# Altium PCB SensorCentral.PcbDoc (part 3 of 3)
Units mm, origin at the board's own origin, x right, y up, seen from the top; angles counter-clockwise.
Board outline 99.21 x 99.07 mm, 6 copper layers (Top Layer 1, GND1, Signal, GND2, GND3, Bottom Layer 1), stack 1.538 mm thick; 91 components, 67 nets, 452 pads, 462 vias.
Unrouted connection lines stored in the file: 278.
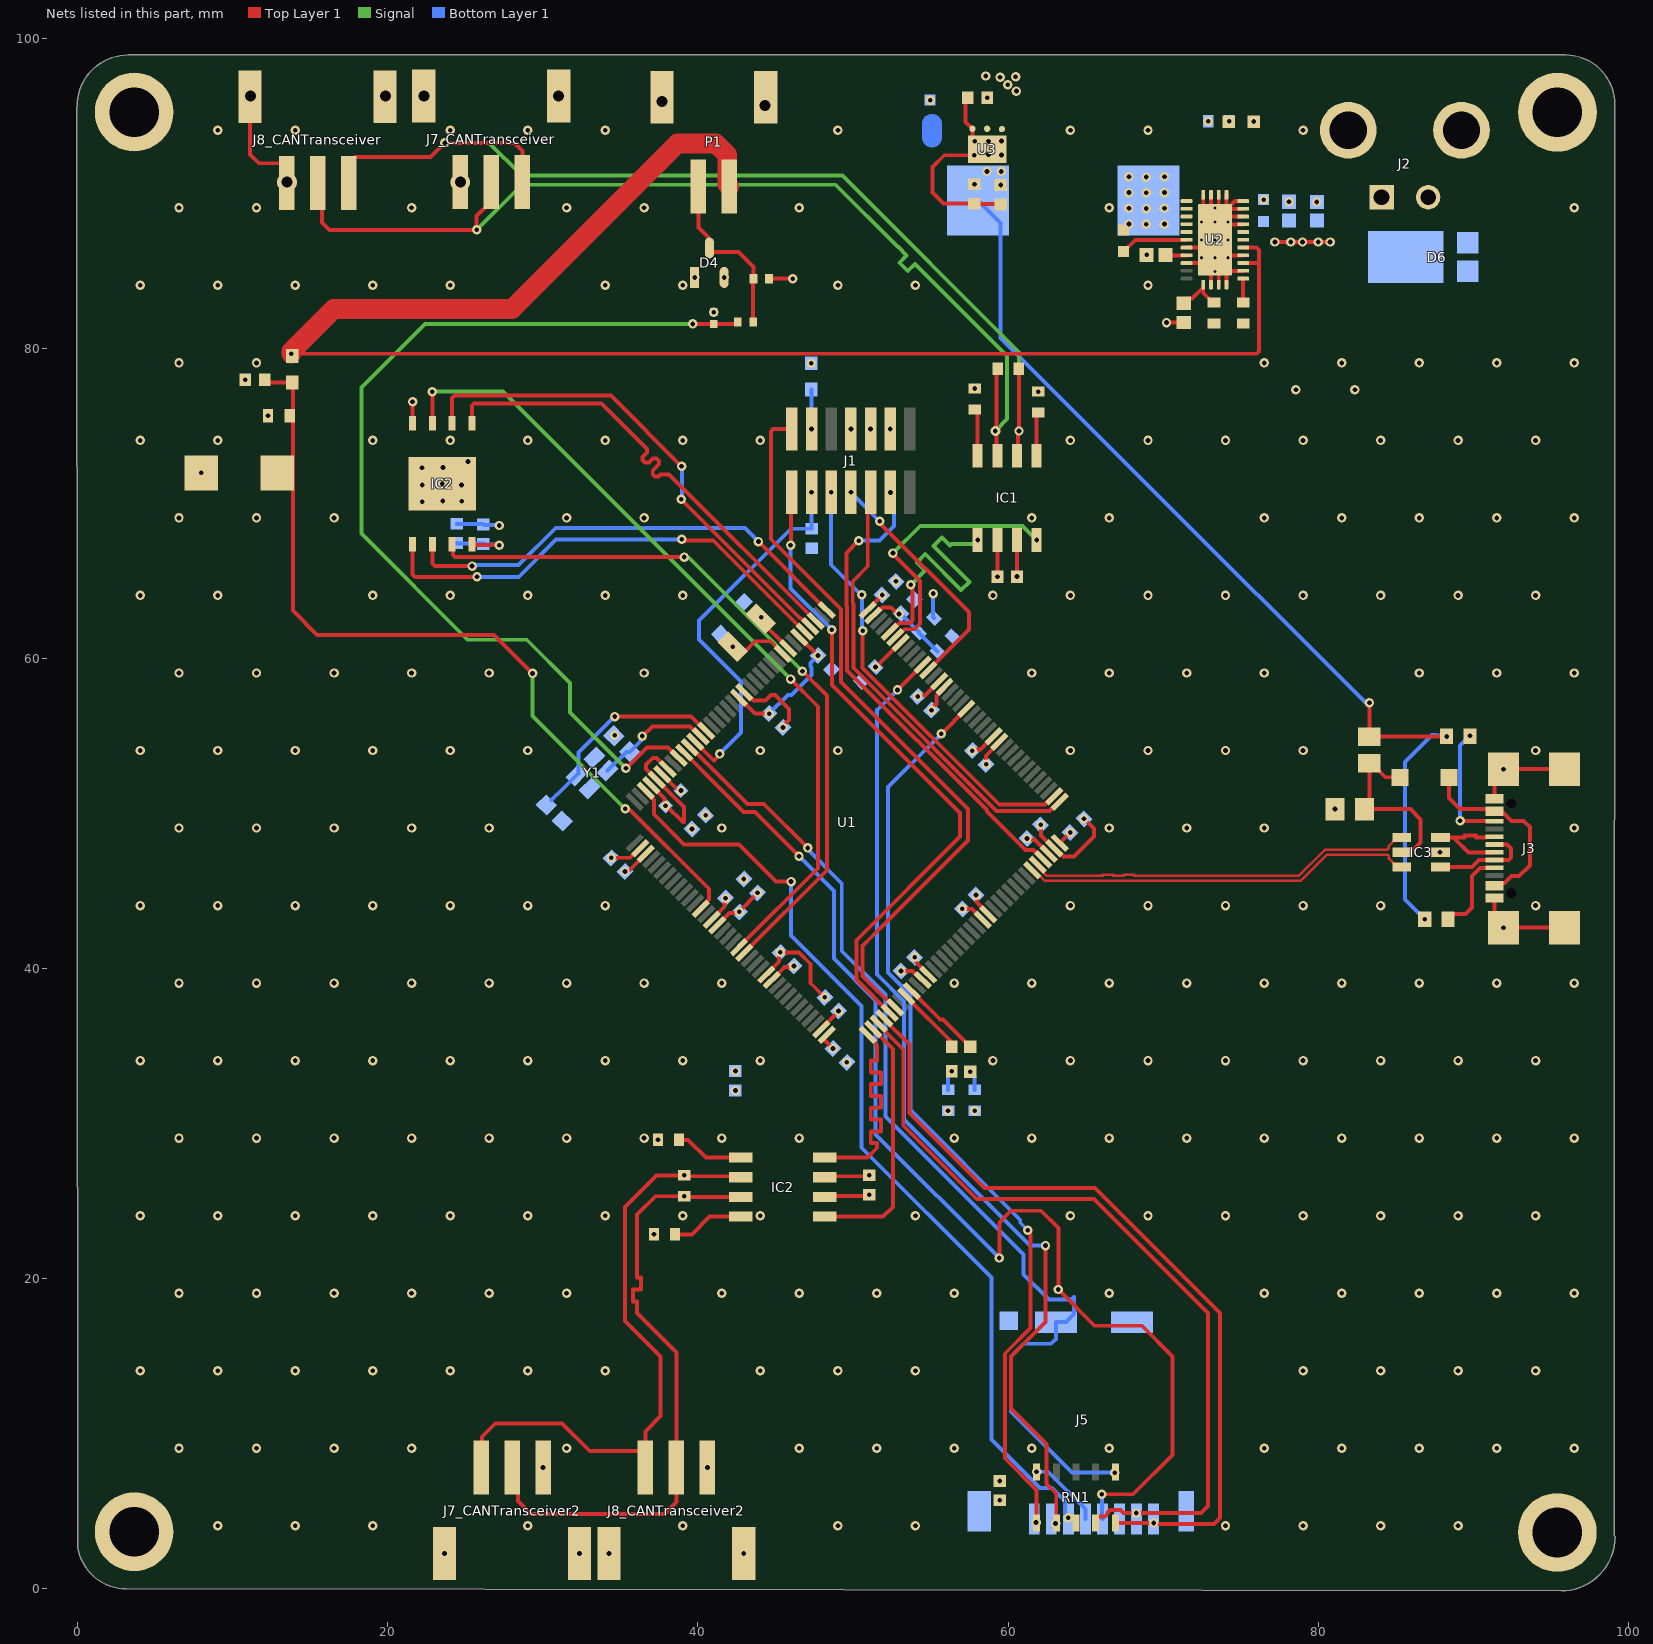
[diagram p6: the nets of this part, all layers, seen from the top]

## Via types
v1: diameter 0.61, hole 0.305, Top Layer 1 to Bottom Layer 1, tented both sides, 441 vias
v2: diameter 0.5, hole 0.2, Top Layer 1 to Bottom Layer 1, 11 vias
v3: diameter 1.27, hole 0.711, Top Layer 1 to Bottom Layer 1, tented both sides, 8 vias
v4: diameter 0.61, hole 0.33, Top Layer 1 to Bottom Layer 1, tented both sides, 1 vias
v5: diameter 0.65, hole 0.305, Top Layer 1 to Bottom Layer 1, tented both sides, 1 vias

## Nets (pads, with @x,y where several pads share a name; then routed paths per layer and width w, separated by ;. In a path a pad name is that pad's centre, name@x,y a point inside that pad or via, vN(x,y) a via of type N, cw(c..) or ccw(c..) an arc to the next point about the centre after c; other vN are vias at no path point)
5V: C8.1 D7.1 FB1.2 IC3.5 | length 11.9
  Top Layer 1 w0.254: FB1.2@83.312,53.252 83.312,50.612 C8.1@82.992,50.292 85.952,50.292 86.614,49.63 86.614,48.128 86.16,47.674 85.56,47.674 IC3.5@85.395,47.508 ; FB1.2@83.437,53.252 84.347,52.342 D7.1@85.007,52.342
ADC1_INP2: C36.1 D5.1 R12.1 R13.2 U1.49 | length 55.5
  Top Layer 1 w0.254: C36.1@12.057,77.978 12.23,77.805 13.937,77.805 13.944,77.797 13.868,77.721 13.868,72.984 D5.1@12.864,71.98 ; D5.1@13.876,73.011 13.876,63.095 15.442,61.53 26.843,61.53 v1(29.332,59.041) ; v1(35.307,50.313) 35.375,50.245 35.607,50.245 40.699,45.153 40.699,44.453 40.17,43.924 U1.49@40.17,43.862
  Signal w0.254: v1(29.332,59.041) 29.332,56.289 v1(35.307,50.313)
AN_P_PRESSURE_NOSE: C7.1 R8.2 U1.28 | length 64.1
  Top Layer 1 w0.254: v1(35.353,52.917) 36.712,54.276 38.065,54.276 U1.28@38.756,53.585 ; v1(39.672,81.582) C7.1@41.027,81.582 42.436,81.582 R8.2@42.559,81.706 R8.2@42.559,81.706
  Signal w0.254: v1(35.353,52.917) 31.75,56.52 31.75,58.42 28.956,61.214 25.146,61.214 18.288,68.072 18.288,77.47 22.4,81.582 v1(39.672,81.582)
BOOT0: R2.2 U1.138 | length 2.3
  Top Layer 1 w0.254: v1(51.455,59.456) 51.489,59.456 53.042,61.009 U1.138@53.075,61.009
CANH_CANTransceiver: IC1.7 J7_CANTransceiver.2 J8_CANTransceiver.2 R16.1 | length 68.6
  Top Layer 1 w0.254: J8_CANTransceiver.2@15.494,90.73 15.748,90.476 15.748,88.138 16.236,87.65 v1(25.728,87.65) 25.728,88.538 26.67,89.48 J7_CANTransceiver.2@26.67,90.73 ; IC1.7@59.309,73.07 59.245,73.134 59.245,74.612 v5(59.182,74.676) 59.258,74.752 59.258,78.619 R16.1@59.334,78.695
  Signal w0.254: v1(25.728,87.65) 28.639,90.561 48.885,90.561 52.826,86.62 52.916,86.53 52.925,86.539 53.463,86 52.992,85.528 53.531,84.99 53.993,85.453 54.149,85.297 59.944,79.502 59.944,75.438 v5(59.182,74.676)
CANH_CANTransceiver2: IC2.7@42.754,25.273 J7_CANTransceiver2.2 J8_CANTransceiver2.2 R16_CANTransceiver2.1 | length 41
  Top Layer 1 w0.254: J7_CANTransceiver2.2@28.008,7.822 28.381,7.449 28.381,5.655 29.21,4.826 37.846,4.826 38.608,5.588 J8_CANTransceiver2.2@38.608,7.822 38.608,15.24 36.068,17.78 36.068,18.415 36.068,18.542 35.814,18.542 35.814,19.304 36.32,19.304 36.32,20.066 36.068,20.066 36.068,20.442 36.068,24.13 37.255,25.317 v1(39.116,25.317) 39.16,25.273 IC2.7@42.754,25.273
CANL_CANTransceiver: IC1.6 J7_CANTransceiver.3 J8_CANTransceiver.3 R16.2 | length 68.6
  Top Layer 1 w0.254: J8_CANTransceiver.3@17.494,90.73 17.494,91.98 17.867,92.353 22.76,92.353 v1(23.663,93.256) 28.156,93.256 28.67,92.742 J7_CANTransceiver.3@28.67,90.73 ; IC1.6@60.579,73.07 60.642,73.134 60.642,74.612 v1(60.706,74.676) 60.697,74.685 60.697,78.686 R16.2@60.688,78.695
  Signal w0.254: v1(23.663,93.256) 26.535,93.256 28.646,91.145 49.317,91.145 60.706,79.756 v1(60.706,74.676)
CANL_CANTransceiver2: IC2.6@42.754,26.543 J7_CANTransceiver2.3 J8_CANTransceiver2.3 R16_CANTransceiver2.2 | length 41
  Top Layer 1 w0.254: J7_CANTransceiver2.3@26.008,7.822 26.06,7.874 26.06,9.804 26.924,10.668 31.242,10.668 33.02,8.89 36.235,8.89 36.608,8.517 J8_CANTransceiver2.3@36.608,7.822 36.608,10.157 37.592,11.141 37.592,14.986 35.306,17.272 35.306,24.638 37.338,26.67 v1(39.116,26.67) 39.179,26.606 42.69,26.606 IC2.6@42.754,26.543
CARD_DETECT: J5.10 RN1.6 U1.26 | length 66.4
  Top Layer 1 w0.254: U1.26@39.463,54.292 39.525,54.292 43.192,50.625 44.246,50.625 v1(47.087,47.783)
  Bottom Layer 1 w0.254: v1(47.087,47.783) 47.087,47.687 49.276,45.498 49.276,41.148 52.094,38.33 52.094,30.459 61,21.553 61,20.28 62.633,18.647 64.074,18.647 64.262,18.835 64.262,17.723 63.738,17.199 J5.10@63.088,17.199 63.088,16.118 62.774,15.804 61.011,15.804 60.198,14.991 60.198,11.43 64.139,7.489 v1(66.882,7.489)
CC1: J3.A5 R18.2 | length 5.6
  Top Layer 1 w0.254: R18.2@88.38,43.18 88.38,43.221 88.678,43.519 89.493,43.519 89.916,43.942 89.916,45.974 90.444,46.502 J3.A5@91.381,46.502
CC2: J3.B5 R19.1 | length 8.5
  Top Layer 1 w0.254: v1@89.155,49.529 90.809,49.529 90.813,49.525 91.356,49.525 J3.B5@91.38,49.501 ; R19.1@89.789,54.977 89.789,55.052 R19.1@90.087,55.35
  Bottom Layer 1 w0.254: v1(89.154,49.53) 89.154,54.379 v1(89.789,55.015)
CD/DAT3: J5.2 RN1.2 U1.134 | length 63.8
  Top Layer 1 w0.254: v1(52.869,57.975) U1.134@54.489,59.595 ; v1(62.417,22.138) 62.417,17.211 60.198,14.991 60.198,11.63 62.489,9.339 62.489,6.759 63.11,6.137 63.11,4.256 v1(63.066,4.212)
  Bottom Layer 1 w0.254: v1(52.869,57.975) 51.562,56.669 51.562,39.612 53.289,37.886 53.289,30.277 61.428,22.138 v1(62.417,22.138)
CL_PRESSURE_NOSE: D4.3 P1.2 R8.1 R17.1 | length 10.9
  Top Layer 1 w0.254: P1.2@40.027,90.194 40.027,87.812 40.677,87.162 40.677,86.544 D4.3@40.738,86.483 ; D4.3@40.738,86.365 40.885,86.218 42.612,86.218 43.575,85.254 R17.1@43.575,84.5 ; R17.1@43.55,84.5 43.55,83.289 43.559,83.28 R8.1@43.559,81.706
CLK: J5.5 U1.27 | length 75
  Top Layer 1 w0.254: U1.27@39.11,53.938 40.157,52.891 40.157,52.875 42.934,50.098 43.671,50.098 v1(46.517,47.252) ; v1(59.436,21.336) 59.436,23.622 60.198,24.384 62.127,24.384 63.246,23.265 v1(63.246,19.304) 65.583,16.967 68.631,16.967 70.612,14.986 70.612,8.636 68.072,6.096 v1(66.04,6.096)
  Bottom Layer 1 w0.254: v1(46.517,47.252) 48.768,45.001 48.768,40.64 51.46,37.948 51.46,29.312 v1(59.436,21.336) ; v1(66.04,6.096) 66.064,6.072 66.064,4.523 J5.5@66.088,4.499
CMD: J5.3 RN1.3 U1.34 | length 62
  Top Layer 1 w0.254: U1.34@36.635,51.464 36.635,51.401 37.163,50.873 37.163,49.959 39.108,48.014 42.644,48.014 45.042,45.616 v1(46.007,45.616) ; v1(63.882,4.58) 64.282,4.58 64.38,4.482 RN1.3@64.38,4.247
  Bottom Layer 1 w0.254: v1(46.007,45.616) 46.007,42.131 50.546,37.592 50.546,28.448 58.928,20.066 58.928,9.633 61.255,7.307 61.255,7.304 61.598,6.961 61.6,6.961 62.072,6.489 62.833,6.489 63.665,5.656 63.665,4.797 v1(63.882,4.58)
CS: IC2.1@25.412,75.176 U1.3 | length 31.4
  Top Layer 1 w0.254: IC2.1@25.412,75.176 25.412,76.305 25.561,76.454 33.782,76.454 36.725,73.511 36.725,73.301 36.427,73.003 36.427,72.793 36.576,72.644 36.83,72.644 37.084,72.898 37.338,72.898 37.487,72.749 37.487,72.539 37.084,72.136 37.084,71.882 37.233,71.733 37.443,71.733 37.592,71.882 38.136,71.882 47.533,62.486 U1.3@47.595,62.486
DAT0: J5.7 RN1.4 U1.75 | length 52.4
  Top Layer 1 w0.254: U1.75@51.661,36.437 51.661,36.375 53.24,34.796 53.24,29.89 57.984,25.146 65.532,25.146 72.898,17.78 72.898,5.334 72.449,4.885 v1(68.277,4.885) 67.455,4.885 67.262,5.078 66.579,5.078 66.414,4.913 66.414,4.839 66.245,4.67 65.748,4.67 65.65,4.572 RN1.4@65.65,4.247
DAT1: J5.8 RN1.5 U1.76 | length 52.3
  Top Layer 1 w0.254: U1.76@52.014,36.791 52.014,36.729 53.648,35.095 53.648,30.68 58.481,25.847 65.598,25.847 73.66,17.784 73.66,4.572 73.279,4.191 69.451,4.191 v1(69.395,4.247) RN1.5@66.92,4.247
DAT2: J5.1 RN1.1 U1.126 | length 60
  Top Layer 1 w0.254: v1(55.7,55.145) 55.7,55.147 57.318,56.764 U1.126@57.318,56.767 ; v1(61.273,23.121) 61.273,23.025 61.455,22.844 61.455,16.825 59.79,15.16 59.79,8.425 61.84,6.375 61.84,4.308 v1(61.807,4.275)
  Bottom Layer 1 w0.254: v1(55.7,55.145) 53.726,53.171 53.71,53.171 52.259,51.72 52.259,39.744 53.697,38.307 53.697,30.873 60.786,23.783 60.786,23.608 v1(61.273,23.121)
DCREG5V0: C18.1 C37.1 C38.1 FB1.1 L2.2 R9.2 R10.1 R18.1 R19.2 U3.5 U3.6 | length 65.7
  Top Layer 1 w0.254: v1(59.522,90.546) C37.1@59.549,90.546 ; R9.2@73.005,81.417 73.207,81.619 R9.2@73.284,81.619 ; v1(83.312,57.15) 83.312,55.002 83.337,54.977 v1(88.289,54.977)
  Bottom Layer 1 w0.254: C18.1@54.974,94.618 C18.1@55.099,94.493 ; L2.2@58.069,89.549 59.522,88.095 59.522,80.686 69.202,71.005 82.99,57.218 83.244,57.218 v1(83.312,57.15) ; v1(86.88,43.18) 85.598,44.462 85.598,53.34 87.338,55.08 87.592,55.08 87.626,55.045 88.221,55.045 v1(88.289,54.977)
  Bottom Layer 1 w1.27: 55.099,93.613 C18.1@55.099,94.493
  other v1: 57.833,90.593 58.642,91.417 59.563,91.417
DN: IC3.1 J3.A7 J3.B7 | length 6.6
  Top Layer 1 w0.254: IC3.1@87.864,46.548 89.913,46.548 90.367,47.002 92.291,47.002 92.44,47.151 92.44,47.755 92.193,48.002 J3.A7@91.381,48.002
DP: IC3.3 J3.A6 J3.B6 | length 6.5
  Top Layer 1 w0.254: IC3.3@88.15,48.471 88.717,48.471 ; J3.A6@91.381,47.502 89.686,47.502 88.717,48.471 ; J3.B6@91.381,48.502 91.358,48.479 90.813,48.479 90.805,48.471 90.658,48.471 90.19,48.471 90.19,48.58 89.428,48.58 89.428,48.471 89.301,48.471 88.717,48.471
FB: R9.1 R11.1 U2.12 | length 3.3
  Top Layer 1 w0.254: R11.1@71.334,82.922 71.634,83.222 71.874,83.222 72.59,83.938 U2.12@72.59,84.109 72.592,84.107 72.592,83.588 73.207,82.973 R9.1@73.284,82.973
FDCAN1_RX: IC1.4 U1.139 | length 17.6
  Top Layer 1 w0.254: v1(52.578,66.802) 52.578,66.75 54.315,65.013 54.315,62.246 53.961,61.892 53.312,61.892 52.784,61.363 U1.139@52.721,61.363
  Signal w0.254: v1(52.578,66.802) 54.338,68.562 60.933,68.562 v1(61.849,67.646)
FDCAN1_TX: IC1.1 U1.140 | length 17.6
  Top Layer 1 w0.254: U1.140@52.368,61.717 52.43,61.717 53.003,62.289 53.133,62.289 53.143,62.3 53.664,62.3 53.83,62.466 53.83,64.427 53.798,64.46 53.798,64.686 v1(53.729,64.754)
  Signal w0.254: v1(53.729,64.754) 54.554,65.579 54.644,65.668 54.121,66.191 54.66,66.73 56.978,64.411 57.517,64.95 55.198,67.269 55.737,67.808 56.26,67.285 56.367,67.392 57.712,67.392 57.966,67.646 v1(58.039,67.646)
FDCAN2_RX: IC2.4@48.178,27.813 U1.73 | length 15.9
  Top Layer 1 w0.254: IC2.4@48.178,27.813 50.927,27.813 51.562,28.448 51.562,28.612 51.562,28.739 51.146,28.739 51.146,29.501 51.793,29.501 51.793,30.263 51.146,30.263 51.146,31.025 51.793,31.025 51.793,31.787 51.146,31.787 51.146,32.549 51.793,32.549 51.793,33.311 51.146,33.311 51.146,34.073 51.562,34.073 51.562,34.249 51.562,35.054 50.954,35.663 U1.73@50.954,35.73
FDCAN2_TX: IC2.1@48.178,24.003 U1.74 | length 15.9
  Top Layer 1 w0.254: 48.941,24.003 51.943,24.003 52.578,24.638 52.578,34.813 U1.74@51.307,36.084
FLASH_RESET: IC2.7@24.142,67.376 U1.57 | length 47.4
  Top Layer 1 w0.254: IC2.7@24.142,67.376 24.194,67.324 24.194,66.697 24.342,66.548 v1(39.116,66.548) ; U1.57@42.999,41.034 48.309,46.344 48.309,57.609 v1(46.736,59.182)
  Signal w0.254: v1(39.116,66.548) 39.184,66.48 39.438,66.48 v1(46.736,59.182)
FLASH_WP: IC2.3@22.872,75.176 U1.56 | length 53
  Top Layer 1 w0.254: v1(22.86,77.216) 22.866,77.21 22.866,75.182 IC2.3@22.872,75.176 ; U1.56@42.645,41.387 47.757,46.499 47.757,56.891 v1(45.974,58.674)
  Signal w0.254: v1(22.86,77.216) 27.432,77.216 v1(45.974,58.674)
GND: C1.2 C2.2 C3.2 C4.2 C5.2 C6.2 C7.2 C8.2 C11.2 C13.2 C14.2 C15.2 C16.2 C18.2 C19.2 C20.2 C21.2 C22.2 C23.2 C24.2 C25.1 C26.2 C27.2 C28.2 C29.2 C30.2 C31.2 C32.2 C33.2 C34.2 C35.2 C36.2 C37.2 C38.2 C39.2 C46.2 C46_CANTransceiver2.2 C47.2 C48.2 C71.2 D5.2 IC1.2 IC2.2@48.178,25.273 IC2.4@21.602,75.176 IC2.9 IC3.2 J1.5 J1.7 J2.2 J2.3 J2.4 J3.A1_B12 J3.B1_A12 J3.SH1 J3.SH2 J3.SH3 J3.SH4 J5.6 J5.9 J5.11 J5.12 J5.13 J7_CANTransceiver2.1 J7_CANTransceiver2.4 J7_CANTransceiver2.5 J7_CANTransceiver.1 J7_CANTransceiver.4 J7_CANTransceiver.5 J8_CANTransceiver2.1 J8_CANTransceiver2.4 J8_CANTransceiver2.5 J8_CANTransceiver.1 J8_CANTransceiver.4 J8_CANTransceiver.5 P1.MP1 P1.MP2 pad.2 R2.1 R3.1 R4.1 R5.1 R6.1 R7.1 R11.2 R13.1 R14.2 R14_CANTransceiver2.2 R15.1 R15_CANTransceiver2.1 R17.2 U1.16 U1.31 U1.38 U1.51 U1.61 U1.83 U1.94 U1.107 U1.120 U1.130 U2.7 U2.9 U2.13 U2.14 U2.15 U2.17 U2.19 U2.23 U2.24 U2.25 U2.26 U2.27 U2.28 U2.29 U2.30 U2.31 U3.3 U3.7 Y1.2 Y1.4 | length 93
  Top Layer 1 w0.254: J8_CANTransceiver.4@11.112,96.228 11.112,92.52 11.684,91.948 13.089,91.948 13.462,91.575 J8_CANTransceiver.1@13.462,90.678 ; v1(21.595,76.557) 21.595,75.182 IC2.4@21.602,75.176 ; J7_CANTransceiver.1@24.638,90.698 v3(24.67,90.73) ; v1(34.407,47.15) 35.618,47.15 36.219,47.751 U1.38@36.281,47.751 ; U1.31@37.695,52.524 38.665,51.555 38.832,51.555 v1(38.9,51.487) ; U1.51@40.877,43.155 41.712,43.99 41.712,44.48 v1(41.78,44.548) ; U1.16@42.999,57.827 43.061,57.827 43.589,57.299 44.345,57.299 44.704,57.658 44.958,57.658 45.869,56.747 45.869,56.043 45.482,55.656 v1(45.482,55.56) ; U1.61@44.413,39.619 45.237,40.444 45.237,40.982 v1(45.305,41.05) 46.507,41.05 47.273,40.284 47.273,39.055 v1(48.179,38.149) ; R17.2@44.575,84.5 v1(46.107,84.5) ; IC2.2@48.178,25.273 48.25,25.345 50.982,25.345 v1(51.054,25.416) ; v1(53.095,39.841) 53.851,39.841 54.427,39.266 U1.83@54.489,39.266 ; v1(55.066,56.668) 55.066,56.764 55.375,57.073 55.375,57.59 55.903,58.119 U1.130@55.903,58.181 ; v1(57.052,43.858) 57.675,43.858 U1.94@58.378,43.155 ; C39.2@57.397,96.176 57.266,96.044 57.266,94.611 U3.3@57.705,94.172 57.705,93.517 v1(57.857,93.364) ; v1(57.819,92.461) 55.885,92.461 55.118,91.694 55.118,90.065 55.844,89.339 C38.2@57.833,89.339 57.856,89.315 59.499,89.315 C37.2@59.522,89.292 ; v1(58.587,53.174) 58.587,53.731 59.439,54.583 U1.120@59.439,54.645 ; IC1.2@59.309,67.646 59.313,67.642 v1(59.313,65.282) C46.2@59.317,65.278 ; v1(62.103,49.279) 62.133,49.249 62.133,48.593 U1.107@62.974,47.751 63.037,47.751 63.565,47.223 64.241,47.223 65.532,48.514 65.532,49.029 v1(64.895,49.666) ; v1(70.222,81.67) R11.2@71.334,81.67 ; U2.9@71.515,85.509 72.367,85.509 U2.31@72.598,85.74 ; U2.7@71.515,86.509 72.84,86.509 v2(73.34,87.009) ; U2.31@72.59,88.169 U2.30@72.59,89.909 ; U2.13@73.09,84.109 73.09,84.836 73.213,84.959 v2(73.34,84.959) ; U2.29@73.09,89.909 73.09,89.182 U2.31@73.213,89.059 ; U2.31@73.467,89.059 73.59,89.182 U2.28@73.59,89.909 ; U2.14@73.59,84.109 U2.31@73.59,85.732 ; U2.31@74.031,88.227 74.313,88.509 U2.24@75.165,88.509 ; U2.15@74.09,84.109 74.09,85.232 74.313,85.009 U2.17@75.165,85.009 ; U2.27@74.09,89.909 74.09,89.039 74.17,89.039 74.638,89.507 75.163,89.507 U2.26@75.165,89.509 ; U2.31@74.12,89.009 U2.25@75.165,89.009 ; U2.31@74.19,85.886 74.313,86.009 U2.19@75.165,86.009 ; v2(74.19,88.169) 74.19,88.132 74.313,88.009 U2.23@75.165,88.009 ; J3.A1_B12@91.381,44.552 91.381,43.217 v1(91.956,42.642) J3.SH3@95.886,42.642 ; J3.B1_A12@91.381,50.952 91.386,50.957 91.386,52.292 v1(91.956,52.862) J3.SH4@95.886,52.862 ; pad.2@95.435,95.238 pad.2@95.457,95.216
  Bottom Layer 1 w0.254: C48.2@24.444,68.699 24.47,68.674 26.126,68.674 26.186,68.614 27.144,68.614 v1(27.178,68.58)
  other v1: 23.658,2.272 32.358,2.272 34.258,2.272 42.958,2.272 9.026,4.069 14.026,4.069 19.026,4.069 29.026,4.069 39.026,4.069 49.026,4.069 54.026,4.069 74.026,4.069 79.026,4.069 84.026,4.069 89.026,4.069 59.473,6.958 30.008,7.822 40.608,7.822 6.526,9.069 11.526,9.069 16.526,9.069 21.526,9.069 31.526,9.069 46.526,9.069 51.526,9.069 56.526,9.069 61.526,9.069 66.526,9.069 76.526,9.069 81.526,9.069 86.526,9.069 91.526,9.069 96.526,9.069 4.026,14.069 9.026,14.069 14.026,14.069 19.026,14.069 24.026,14.069 29.026,14.069 34.026,14.069 44.026,14.069 49.026,14.069 54.026,14.069 79.026,14.069 84.026,14.069 89.026,14.069 94.026,14.069 6.526,19.069 11.526,19.069 16.526,19.069 21.526,19.069 26.526,19.069 31.526,19.069 41.526,19.069 46.526,19.069 51.526,19.069 56.526,19.069 66.526,19.069 76.526,19.069 81.526,19.069 86.526,19.069 91.526,19.069 96.526,19.069 37.169,22.86 4.026,24.069 9.026,24.069 14.026,24.069 19.026,24.069 24.026,24.069 29.026,24.069 34.026,24.069 39.026,24.069 44.026,24.069 54.026,24.069 64.026,24.069 69.026,24.069 74.026,24.069 79.026,24.069 84.026,24.069 89.026,24.069 94.026,24.069 37.423,28.956 6.526,29.069 11.526,29.069 16.526,29.069 21.526,29.069 26.526,29.069 31.526,29.069 36.526,29.069 41.526,29.069 46.526,29.069 56.526,29.069 61.526,29.069 66.526,29.069 71.526,29.069 76.526,29.069 81.526,29.069 86.526,29.069 91.526,29.069 96.526,29.069 56.134,30.831 57.847,30.831 42.418,33.393 49.6,33.961 4.026,34.069 9.026,34.069 14.026,34.069 19.026,34.069 24.026,34.069 29.026,34.069 34.026,34.069 39.026,34.069 44.026,34.069 59.026,34.069 64.026,34.069 69.026,34.069 74.026,34.069 79.026,34.069 84.026,34.069 89.026,34.069 94.026,34.069 6.526,39.069 11.526,39.069 16.526,39.069 21.526,39.069 26.526,39.069 31.526,39.069 36.526,39.069 41.526,39.069 56.526,39.069 61.526,39.069 66.526,39.069 71.526,39.069 76.526,39.069 81.526,39.069 86.526,39.069 91.526,39.069 96.526,39.069 4.026,44.069 9.026,44.069 14.026,44.069 19.026,44.069 24.026,44.069 29.026,44.069 34.026,44.069 64.026,44.069 69.026,44.069 74.026,44.069 79.026,44.069 84.026,44.069 94.026,44.069 42.961,45.779 87.864,47.498 6.526,49.069 11.526,49.069 16.526,49.069 21.526,49.069 26.526,49.069 41.526,49.069 66.526,49.069 71.526,49.069 76.526,49.069 96.526,49.069 40.497,49.895 81.092,50.292 4.026,54.069 9.026,54.069 14.026,54.069 19.026,54.069 24.026,54.069 29.026,54.069 44.026,54.069 49.026,54.069 64.026,54.069 69.026,54.069 74.026,54.069 79.026,54.069 94.026,54.069 34.632,55.045 6.526,59.069 11.526,59.069 16.526,59.069 21.526,59.069 26.526,59.069 36.526,59.069 61.526,59.069 66.526,59.069 71.526,59.069 76.526,59.069 86.526,59.069 91.526,59.069 96.526,59.069 4.026,64.069 9.026,64.069 19.026,64.069 24.026,64.069 29.026,64.069 34.026,64.069 39.026,64.069 59.026,64.069 64.026,64.069 69.026,64.069 74.026,64.069 79.026,64.069 84.026,64.069 89.026,64.069 94.026,64.069 52.766,64.984 6.526,69.069 11.526,69.069 16.526,69.069 31.526,69.069 36.526,69.069 61.526,69.069 66.526,69.069 76.526,69.069 81.526,69.069 86.526,69.069 91.526,69.069 96.526,69.069 22.221,70.114 24.772,70.147 23.535,70.164 22.212,71.198 24.747,71.198 23.507,71.276 7.964,71.98 22.204,72.3 23.551,72.317 25.171,72.707 4.026,74.069 9.026,74.069 19.026,74.069 24.026,74.069 29.026,74.069 34.026,74.069 39.026,74.069 44.026,74.069 64.026,74.069 69.026,74.069 74.026,74.069 79.026,74.069 84.026,74.069 89.026,74.069 94.026,74.069 49.864,74.802 51.134,74.802 12.269,75.659 61.954,77.216 78.566,77.339 82.376,77.339 57.855,77.414 10.803,77.978 47.315,79.047 6.526,79.069 11.526,79.069 76.526,79.069 81.526,79.069 86.526,79.069 91.526,79.069 96.526,79.069 41.027,82.339 4.026,84.069 9.026,84.069 14.026,84.069 19.026,84.069 24.026,84.069 34.026,84.069 39.026,84.069 49.026,84.069 54.026,84.069 69.026,84.069 68.943,86.038 6.526,89.069 11.526,89.069 21.526,89.069 31.526,89.069 36.526,89.069 46.526,89.069 66.526,89.069 96.526,89.069 78.122,89.463 79.92,89.453 76.488,89.599 59.58,92.481 58.741,92.506 58.741,93.364 59.574,93.377 9.026,94.069 14.026,94.069 24.026,94.069 29.026,94.069 34.026,94.069 49.026,94.069 64.026,94.069 69.026,94.069 79.026,94.069 72.911,94.664 54.974,96.018
  other v2: 72.49,85.849 73.34,85.849 74.19,85.849 72.49,87.009 74.19,87.009 72.49,88.169 73.34,88.169 73.34,89.059
  other v3: 13.494,90.73 44.329,95.676 37.677,95.944 11.144,96.28 19.844,96.28 22.32,96.28 31.02,96.28
MISO: IC2.2@24.142,75.176 U1.4 | length 32.3
  Top Layer 1 w0.254: IC2.2@24.142,75.176 24.142,76.813 24.291,76.962 34.383,76.962 v1(38.945,72.4) ; v1(38.914,70.276) 46.591,62.599 46.651,62.599 47.179,62.07 U1.4@47.241,62.07
  Bottom Layer 1 w0.254: v1(38.914,70.276) 38.976,70.338 38.976,72.369 v1(38.945,72.4)
MOSI: IC2.5@21.602,67.376 U1.5 | length 30.8
  Top Layer 1 w0.254: IC2.5@21.602,67.376 21.602,65.419 21.753,65.268 v1(25.748,65.268) ; v1(38.962,67.688) 39.03,67.62 39.281,67.62 39.282,67.619 40.985,67.619 U1.5@46.888,61.717
  Bottom Layer 1 w0.254: v1(25.748,65.268) 25.751,65.271 28.441,65.271 30.844,67.674 38.948,67.674 v1(38.962,67.688)
NetC11_1: C11.1 U2.8 | length 1.4
  Top Layer 1 w0.254: C11.1@70.144,86.038 70.174,86.009 U2.8@71.515,86.009
NetC12_1: C12.1 U2.6 | length 5.1
  Top Layer 1 w0.254: C12.1@67.442,86.246 68.204,87.009 U2.6@71.515,87.009 70.813,87.009
NetC12_2: C12.2 L2.1 U2.1 U2.2 U2.3 U2.4 U2.5
  other v1: 68.914,88.007 67.799,88.025 70.085,88.025 68.914,89.023 67.799,89.041 70.085,89.041 68.914,90.039 67.799,90.057 70.085,90.057 68.914,91.055 67.799,91.073 70.085,91.073
NetC21_1: C21.1 U1.71 | length 1.6
  Top Layer 1 w0.254: U1.71@47.948,36.084 47.948,36.114 49.066,37.232 v1(49.066,37.262)
NetC22_1: C22.1 U1.106 | length 1.8
  Top Layer 1 w0.254: v1(61.216,48.392) 61.284,48.324 61.694,48.324 U1.106@62.621,47.398
NetD1_1: D1.1 R5.2
  other v1: 74.265,94.664
NetD2_1: D2.1 R6.2 | length 1.3
  Bottom Layer 1 w0.254: R6.2@56.134,32.184 56.134,33.045 56.367,33.277 v1(56.367,33.373)
NetD3_1: D3.1 R4.2 | length 1.3
  Bottom Layer 1 w0.254: v1(57.566,33.353) 57.566,33.256 57.847,32.976 R4.2@57.847,32.184
NetD7_2: D7.2 J3.A4_B9 J3.B4_A9 | length 12.6
  Top Layer 1 w0.254: D7.2@88.443,52.324 88.443,51.003 89.154,50.292 91.713,50.292 92.475,49.53 93.256,49.53 93.655,49.131 93.655,46.665 92.964,45.974 92.475,45.974 92.026,45.525 91.554,45.525 J3.A4_B9@91.381,45.352
NetIC1_5: IC1.5 R15.2 | length 2.8
  Top Layer 1 w0.254: IC1.5@61.849,73.07 61.849,75.758 R15.2@61.954,75.863
NetIC1_8: IC1.8 R14.1 | length 3.1
  Top Layer 1 w0.254: R14.1@57.855,76.06 58.039,75.876 IC1.8@58.039,73.07
NetIC1_CANTransceiver2_5: IC2.5@42.754,27.813 R15_CANTransceiver2.2 | length 4.5
  Top Layer 1 w0.254: R15_CANTransceiver2.2@38.777,28.956 39.37,28.956 40.513,27.813 IC2.5@42.754,27.813
NetIC1_CANTransceiver2_8: IC2.8@42.754,24.003 R14_CANTransceiver2.1 | length 4.5
  Top Layer 1 w0.254: R14_CANTransceiver2.1@38.777,22.86 39.614,22.86 40.757,24.003 IC2.8@42.754,24.003
NetJ1_11: J1.11 R7.2 | length 2.5
  Bottom Layer 1 w0.254: R7.2@47.315,77.347 47.324,77.337 v1(47.324,74.802)
NetR10_2: R10.2 U2.16 | length 1.5
  Top Layer 1 w0.254: U2.16@75.165,84.509 75.165,82.992 R10.2@75.184,82.973
OTG_FS_N: IC3.6 U1.103 | length 25.2
  Top Layer 1 w0.161: U1.103@61.56,46.337 61.688,46.337 62.177,45.848 62.18,45.848 62.366,45.662 78.873,45.662 80.562,47.351 84.466,47.351 84.56,47.257 84.56,47.093 85.095,46.558 IC3.6@85.395,46.558
OTG_FS_P: IC3.4 U1.104 | length 25.2
  Top Layer 1 w0.161: U1.104@61.914,46.691 61.914,46.562 62.402,46.074 62.402,46.071 62.497,45.977 65.523,45.977 66.122,45.977 66.122,46.044 66.79,46.044 66.79,45.977 67.459,45.977 67.459,46.044 68.128,46.044 68.128,45.977 68.877,45.977 78.743,45.977 80.432,47.666 84.466,47.666 84.56,47.76 84.56,47.924 85.095,48.458 IC3.4@85.395,48.458
PD11: D2.2 U1.80 | length 4.4
  Top Layer 1 w0.254: U1.80@53.428,38.205 56.434,35.2 D2.2@56.623,35.2
PD12: D3.2 U1.81 | length 5.3
  Top Layer 1 w0.254: U1.81@53.782,38.559 55.625,36.715 55.804,36.715 D3.2@57.566,34.953
PDR_ON: C2.1 R1.2 R3.2 U1.143 | length 5.6
  Top Layer 1 w0.254: U1.143@51.307,62.777 51.369,62.777 51.898,63.306 52.443,63.306 52.874,62.875 v1(52.97,62.875)
  Bottom Layer 1 w0.254: v1(52.97,62.875) 53.048,62.875 C2.1@53.083,62.91 53.083,62.879 54.264,61.698 54.264,61.654 55.449,60.468 R3.2@55.449,60.455
SCK: IC2.6@22.872,67.376 U1.1 | length 30
  Top Layer 1 w0.254: IC2.6@22.872,67.376 22.872,66.113 23.022,65.962 v1(25.431,65.962) ; v1(43.898,67.547) 43.898,67.541 48.302,63.137 U1.1@48.302,63.131
  Bottom Layer 1 w0.254: v1(25.431,65.962) 25.497,66.029 28.437,66.029 30.828,68.42 43.026,68.42 v1(43.898,67.547)
T_JTDI: J1.10 U1.110 | length 28.5
  Top Layer 1 w0.254: v1(50.621,61.801) 50.621,59.395 59.435,50.581 62.384,50.581 62.912,51.11 U1.110@62.974,51.11
  Bottom Layer 1 w0.254: v1(48.594,70.732) 48.58,70.718 48.58,66.049 v1@50.514,64.115 ; v1(50.568,64.115) v1@50.514,64.115 ; v1(50.621,61.801) 50.594,61.828 50.594,64.034 v1@50.514,64.115
T_NRST: C1.1 J1.12 U1.25 | length 24.7
  Top Layer 1 w0.254: U1.25@39.817,54.645 39.817,54.633 41.042,53.408 41.402,53.768 v1(41.402,53.848)
  Bottom Layer 1 w0.254: v1(41.402,53.848) 42.788,55.234 42.788,58.507 40.06,61.235 40.06,62.446 45.988,68.374 47.318,68.374 47.324,68.38 v1(47.324,70.732)
T_SWCLK: J1.6 U1.109 | length 29.2
  Top Layer 1 w0.254: J1.6@51.134,70.732 50.953,70.551 50.953,65.954 49.982,64.983 49.982,63.57 50.035,63.518 50.035,59.404 59.266,50.173 62.683,50.173 63.266,50.756 U1.109@63.328,50.756
T_SWDIO: J1.4 U1.105 | length 31.5
  Top Layer 1 w0.254: v1(50.364,67.604) 49.574,66.814 49.574,63.401 49.627,63.349 49.627,59.235 58.632,50.23 58.632,50.148 61.115,47.664 61.644,47.664 62.265,47.044 U1.105@62.267,47.044 ; J1.4@52.343,70.793 J1.4@52.404,70.732
  Bottom Layer 1 w0.254: v1(50.364,67.604) 51.699,67.604 52.634,68.539 52.634,70.407 52.421,70.62 v1(52.421,70.716)
T_SWO: J1.8 U1.133 | length 15.7
  Top Layer 1 w0.254: v1(51.719,68.855) 51.787,68.787 51.787,68.685 57.482,62.989 57.482,61.881 U1.133@54.843,59.242
  Bottom Layer 1 w0.254: v1(49.864,70.732) 49.864,70.709 v1(51.719,68.855)
T_VCP_RX: J1.13 U1.78 | length 47.5
  Top Layer 1 w0.254: J1.13@46.054,74.802 44.853,74.802 44.704,74.653 44.704,67.695 49.219,63.18 49.219,58.477 57.404,50.292 57.404,48.26 52.193,43.049 51.308,42.164 51.308,42.152 50.621,41.465 50.621,39.536 52.659,37.498 U1.78@52.721,37.498
T_VCP_TX: J1.14 U1.77 | length 41.8
  Top Layer 1 w0.254: v1(45.974,67.31) 46.014,67.35 46.014,70.692 J1.14@46.054,70.732 ; v1(48.633,61.858) 48.635,61.857 48.635,58.299 56.896,50.038 56.896,48.514 50.213,41.831 50.213,39.299 U1.77@52.368,37.145
  Bottom Layer 1 w0.254: v1(45.974,67.31) 45.974,64.523 48.633,61.864 v1(48.633,61.858)
VBAT: C13.1 C14.1 C15.1 D6.3 P1.1 R12.2 U2.18 U2.20 U2.21 U2.22 | length 110.5
  Top Layer 1 w0.254: v1(13.767,79.66) 76.027,79.66 76.176,79.809 76.176,86.36 76.027,86.509 U2.20@75.165,86.509 ; U2.18@75.413,85.511 75.461,85.511 75.465,85.515 76.05,85.515 ; v1(77.216,86.868) v1(78.232,86.868) v1(78.994,86.868) v1(80.01,86.868) v1(80.772,86.868)
  Top Layer 1 w1.27: v1(13.767,79.66) 13.767,79.807 16.51,82.55 28.009,82.55 38.677,93.218 41.148,93.218 41.892,92.474 41.892,90.583 P1.1@42.027,90.448
VBAT_IN: D6.1 D6.2 J2.1
VDD: C16.1 C19.1 C20.1 C23.1 C24.1 C25.2 C26.1 C27.1 C28.1 C29.1 C30.1 C31.1 C32.1 C33.1 C34.1 C35.1 C39.1 C46.1 C46_CANTransceiver2.1 C47.1 C48.1 C71.1 D1.2 D4.1 D4.2 IC1.3 IC2.3@48.178,26.543 IC2.8@25.412,67.376 J1.3 J5.4 R1.1 RN1.10 U1.6 U1.17 U1.30 U1.32 U1.33 U1.39 U1.52 U1.62 U1.72 U1.84 U1.95 U1.108 U1.121 U1.131 U1.144 U3.1 U3.2 | length 52.8
  Top Layer 1 w0.254: IC2.8@25.412,67.376 25.477,67.31 v1(27.178,67.31) ; v1(35.294,46.263) 35.362,46.331 35.568,46.331 U1.39@36.635,47.398 ; U1.33@36.988,51.817 37.842,50.963 37.842,50.565 v1(37.91,50.497) 37.983,50.497 39.023,49.457 39.095,49.457 39.095,50.418 36.644,52.869 36.644,53.154 37.084,53.594 37.333,53.594 U1.30@38.049,52.878 ; D4.1@39.707,84.5 v1(39.788,84.582) ; U1.52@41.231,42.801 42.023,43.593 42.599,43.593 v1(42.667,43.661) 42.667,43.687 43.847,44.867 v1(43.847,44.893) ; U1.17@42.645,57.474 43.673,56.446 v1(44.595,56.446) ; U1.62@44.766,39.266 45.596,40.095 46.124,40.095 v1(46.192,40.163) ; U1.6@46.534,61.363 46.563,61.363 v1(47.736,60.191) ; IC2.3@48.178,26.543 48.242,26.606 50.99,26.606 v1(51.054,26.67) ; U1.72@48.302,35.73 48.1,35.529 48.1,35.461 v1(48.714,34.847) ; U1.144@50.954,63.131 50.954,63.151 51.88,64.077 v1(51.88,64.097) ; v1(53.982,40.728) 54.05,40.66 54.05,40.412 U1.84@54.843,39.619 ; v1(54.179,57.554) 54.247,57.622 54.638,57.622 U1.131@55.55,58.535 ; v1(57.7,54.061) 57.768,54.129 58.215,54.129 U1.121@59.085,54.999 ; v1(57.939,44.745) 58.007,44.677 58.007,44.277 58.732,43.552 U1.95@58.732,43.509 ; C46.1@60.571,65.278 v4(60.575,65.282) 60.575,67.642 IC1.3@60.579,67.646 ; U1.108@63.328,48.105 63.335,48.105 v1(64.009,48.779)
  Bottom Layer 1 w0.254: C48.1@24.444,67.445 24.47,67.42 26.126,67.42 26.194,67.352 27.136,67.352 v1(27.178,67.31) ; v1(44.595,56.446) 45.804,57.655 46.039,57.655 47.322,58.938 47.322,59.425 47.251,59.496 47.251,59.706 v1(47.736,60.191) ; v1(55.172,64.194) 55.167,64.188 55.167,62.678 R1.1@55.221,62.624 ; v1(61.84,7.547) 62.59,7.547 64.988,5.149 J5.4@64.988,4.499
  other v1: 59.473,5.704 42.418,32.139 39.61,49.008 52.404,74.802 41.688,84.582 75.84,94.638 58.651,96.176 60.542,96.601 59.987,97.013 59.485,97.495 60.485,97.519 58.567,97.575
XTAL1A: C5.1 U1.8 Y2.1 | length 2.7
  Top Layer 1 w0.254: v1(44.078,62.669) 44.078,62.405 U1.8@45.827,60.656
XTAL1B: C6.1 U1.9 Y2.2 | length 3.9
  Top Layer 1 w0.254: v1(42.253,60.77) 42.535,60.487 43.063,60.487 43.691,61.114 44.661,61.114 U1.9@45.474,60.302
XTAL2A: C3.1 U1.23 Y1.1 | length 13.3
  Top Layer 1 w0.254: v1(34.624,56.257) 39.557,56.257 40.462,55.353 U1.23@40.524,55.353
  Bottom Layer 1 w0.254: 30.56,50.89 30.884,51.215 30.914,51.215 Y1.1@32.172,52.473 32.296,52.597 32.296,53.929 v1(34.624,56.257)
XTAL2B: C4.1 U1.24 Y1.3 | length 7.6
  Top Layer 1 w0.254: v1(36.414,54.999) 36.432,54.999 37.059,55.626 39.481,55.626 40.108,54.999 U1.24@40.17,54.999
  Bottom Layer 1 w0.254: Y1.3@34.17,52.774 35.382,53.986 C4.1@35.602,53.986 36.346,54.731 36.346,54.931 v1(36.414,54.999)
pads on no net: J1.1 J1.2 J1.9 J3. J3.A8 J3.B8 RN1.7 RN1.8 RN1.9 U1.2 U1.7 U1.10 U1.11 U1.12 U1.13 U1.14 U1.15 U1.18 U1.19 U1.20 U1.21 U1.22 U1.29 U1.35 U1.36 U1.37 U1.40 U1.41 U1.42 U1.43 U1.44 U1.45 U1.46 U1.47 U1.48 U1.50 U1.53 U1.54 U1.55 U1.58 U1.59 U1.60 U1.63 U1.64 U1.65 U1.66 U1.67 U1.68 U1.69 U1.70 U1.79 U1.82 U1.85 U1.86 U1.87 U1.88 U1.89 U1.90 U1.91 U1.92 U1.93 U1.96 U1.97 U1.98 U1.99 U1.100 U1.101 U1.102 U1.111 U1.112 U1.113 U1.114 U1.115 U1.116 U1.117 U1.118 U1.119 U1.122 U1.123 U1.124 U1.125 U1.127 U1.128 U1.129 U1.132 U1.135 U1.136 U1.137 U1.141 U1.142 U2.10 U2.11 U3.4

## Polygon pours and split planes (outlines as drawn)
GND on Top Layer 1 "GND_L01_P052" (solid, pour order 52): -0.508,99.822 98.806,99.822 99.822,98.806 99.568,98.552 99.568,-1.778 1.524,-1.778 -0.508,0.254
DCREG5V0 on Top Layer 1 "NONET_L06_P-001" (solid, pour order 3): 57.427,90.972 57.757,90.972 58.569,91.784 59.691,91.784 70.702,80.772 71.701,80.772 72.878,81.949 75.59,81.949 75.59,80.162 75.438,80.01 75.184,80.264 60.452,80.264 60.452,89.148 59.882,89.718 57.427,89.718
VBAT on Top Layer 1 "VBAT_L01_P005" (solid, remove dead copper, pour order 5): 74.816,87.632 74.801,87.617 74.801,86.387 81.269,86.387 81.193,87.629 78.285,87.617
NetC12_2 on Top Layer 1 "NETC12_2_L01_P006" (solid, remove dead copper, pour order 6): 71.892,87.385 71.892,90.982 71.079,91.795 67.084,91.795 67.084,87.327 67.073,87.316
DCREG5V0 on Top Layer 1 "DCREG5V0_L01_P011" (solid, remove dead copper, pour order 11): 57.039,90.067 57.049,90.057 59.925,90.057 59.925,91.77 59.94,91.785 59.924,91.801 57.039,91.801
VDD on Top Layer 1 "VDD_L01_P025" (solid, remove dead copper, pour order 25): 58.161,94.099 58.147,94.113 58.147,98.439 61.449,98.439 61.449,93.867 58.409,93.867 58.12,94.155
GND on Bottom Layer 1 "Bottom Layer 1-GND" (solid, remove dead copper, pour order 50): 0.723,94.864 0.776,1.924 ccw(c3.906,2.459) 3.906,-0.716 96.451,-0.847 ccw(c96.451,2.632) 99.93,2.632 99.893,2.721 99.919,95.042 ccw(c96.743,95.042) 96.743,98.217 4.061,98.217 4.036,98.22 ccw(c4.036,94.915) 0.731,94.915
VBAT on Bottom Layer 1 "NONET_L06_P-001" (solid, pour order 4): 88.091,84.217 88.091,87.577 83.231,87.577 82.103,88.705 77.678,88.705 77.668,88.714 77.503,88.549 76.138,88.549 76.138,87.849 76.113,87.824 76.113,84.265 76.065,84.217
VBAT_IN on Bottom Layer 1 "NONET_L06_P-001" (solid, pour order 46): 82.529,90.932 92.71,90.932 93.726,89.916 93.726,82.804 88.705,82.804 88.283,83.226 88.283,87.893 82.661,87.893
DCREG5V0 on Bottom Layer 1 "DCREG" (solid, remove dead copper, pour order 49): 56.115,87.263 53.692,89.685 50.609,89.685 50.609,93.696 50.781,93.867 50.903,93.745 56.191,93.745
GND on GND2 "GND2-GND" (solid, remove dead copper, pour order 43): -0.055,95.576 -0.002,2.635 ccw(c3.128,3.171) 3.128,-0.004 95.673,-0.135 ccw(c95.673,3.344) 99.152,3.344 99.115,3.433 99.141,95.754 ccw(c95.965,95.754) 95.965,98.929 3.283,98.929 3.258,98.932 ccw(c3.258,95.627) -0.047,95.627
GND on GND1 "GND1-GND" (solid, remove dead copper, pour order 44): 0.377,95.755 0.431,2.815 ccw(c3.561,3.35) 3.561,0.175 96.105,0.044 ccw(c96.105,3.523) 99.584,3.523 99.548,3.612 99.573,95.933 ccw(c96.398,95.933) 96.398,99.108 3.716,99.108 3.69,99.111 ccw(c3.69,95.806) 0.385,95.806
GND on GND3 "GND3-GND" (solid, remove dead copper, pour order 45): -0.055,95.576 -0.002,2.635 ccw(c3.128,3.171) 3.128,-0.004 95.673,-0.135 ccw(c95.673,3.344) 99.152,3.344 99.115,3.433 99.141,95.754 ccw(c95.965,95.754) 95.965,98.929 3.283,98.929 3.258,98.932 ccw(c3.258,95.627) -0.047,95.627
VDD on Signal "Signal-3V3" (solid, remove dead copper, pour order 48): -0.055,95.576 -0.002,2.635 ccw(c3.128,3.171) 3.128,-0.004 95.673,-0.135 ccw(c95.673,3.344) 99.152,3.344 99.115,3.433 99.141,95.754 ccw(c95.965,95.754) 95.965,98.929 3.283,98.929 3.258,98.932 ccw(c3.258,95.627) -0.047,95.627

## Silkscreen, mask and mechanical layers (free items; w line width, h text height)
Top Overlay:
  drawing of 194 lines, arcs and shapes, not listed
  text "Pressure" at 48.514,97.282 h1.52 r270
  text "CAN1" at 13.208,86.106 h1.52
  text "CAN1" at 24.384,86.106 h1.52
  text "IC1" at 65.024,69.088 h1.52 r90
  text "USB-C" at 90.932,55.424 h1.52
  text "IC3" at 84.836,43.942 h1.22
  text "Sensor system (SS)" at 76.358,32.862 h2.54 r90
  text "IC2" at 43.18,20.574 h1.52
  text "CAN2" at 24.892,10.922 h1.52
  text "CAN2" at 35.306,10.922 h1.52
Board:
  lines w0.254: 0.072,2.739 0.072,95.576 ; 0.08,3.171 ccw(c3.128,3.171) 3.128,0.123 95.673,-0.008 ccw(c95.673,3.344) 99.025,3.344 ; 0.08,95.627 cw(c3.258,95.627) 3.258,98.805 ; 3.255,98.802 95.965,98.802 cw(c95.965,95.754) 99.013,95.754 98.988,3.298

## Text inside footprints (layer, text, board x,y; h text height)
J3: Top 3D Body "PCB EDGE" at 98.456,54.502 h0.8 r90